# EAGLE board 210042174_Hasin_Mahtab_Task_01 (EAGLE 9.7.0)

Size 176.64 x 83.66 mm. Coordinates in mm from the lower left corner, seen from the top.
Outline: 0,0 176.64,0 176.64,83.67 0,83.67 0,0
Copper layers (1*16): Top 0.035mm / dielectric 1.5mm / Bottom 0.035mm
Design rules "default": minimum track width 6mil, minimum drill 0.35mm, track to track 6mil, track to pad 6mil, pad to pad 6mil, via to via 6mil, smd to smd 6mil, copper to edge 40mil, drill to drill 6mil, minimum pad ring 10mil, minimum via ring 8mil, stop-mask expansion 4mil, vias tented up to drill 0mil, thermal gap 10mil

## Footprints (pad centres in the part's own frame; a part is rotated, then mirrored left to right if it is on the bottom)
ARDUINO-UNO-R3-SHIELD = drill 1.016 pad 1.88: 3.3V 24.13,-2.54; 5V 24.13,0; A0 24.13,12.7; A1 24.13,15.24; A2 24.13,17.78; A3 24.13,20.32; A4 24.13,22.86; A5 24.13,25.4; AREF -24.13,-13.97; D2 -24.13,20.32; D3 -24.13,17.78; D4 -24.13,15.24; D5 -24.13,12.7; D6 -24.13,10.16; D7 -24.13,7.62; D8 -24.13,3.81; D9 -24.13,1.27; D10 -24.13,-1.27; D11 -24.13,-3.81; D12 -24.13,-6.35; D13 -24.13,-8.89; GND@0 24.13,2.54; GND@1 24.13,5.08; GND@2 -24.13,-11.43; IOREF 24.13,-7.62; NC 24.13,-10.16; RES 24.13,-5.08; RX -24.13,25.4; SCL -24.13,-19.05; SDA -24.13,-16.51; TX -24.13,22.86; VIN 24.13,7.62

## Placement (x,y rotation side)
UUNO_MASTER  ARDUINO-UNO-R3-SHIELD  [ARDUINO-UNO-R3-SHIELD]  29.84,34.52 180 top
UUNO_SLAVE  ARDUINO-UNO-R3-SHIELD  [ARDUINO-UNO-R3-SHIELD]  146.8,35.78 180 top

## Library data of the parts
UUNO_MASTER UUNO_SLAVE = Tinkercad

## Nets
UUNO_MASTER_A4: UUNO_MASTER.A4 UUNO_SLAVE.A4
UUNO_MASTER_A5: UUNO_MASTER.A5 UUNO_SLAVE.A5
UUNO_MASTER_GND: UUNO_MASTER.GND@0 UUNO_MASTER.GND@1 UUNO_MASTER.GND@2 UUNO_SLAVE.GND@0 UUNO_SLAVE.GND@1 UUNO_SLAVE.GND@2

## Tracks (layer width: path | path; a pad name or v marks a point on that pad's centre or on a via)
UUNO_MASTER_A4  (1 unrouted)
UUNO_MASTER_A5  (1 unrouted)
UUNO_MASTER_GND  (5 unrouted)